# Altium PCB StepStick-2.PcbDoc
Units mil, origin at the board's own origin, x right, y up, seen from the top; angles counter-clockwise.
Board outline 1150 x 1155 mil, 2 copper layers (Top Layer, Bottom Layer); 4 components, 11 nets, 32 pads, 0 vias.
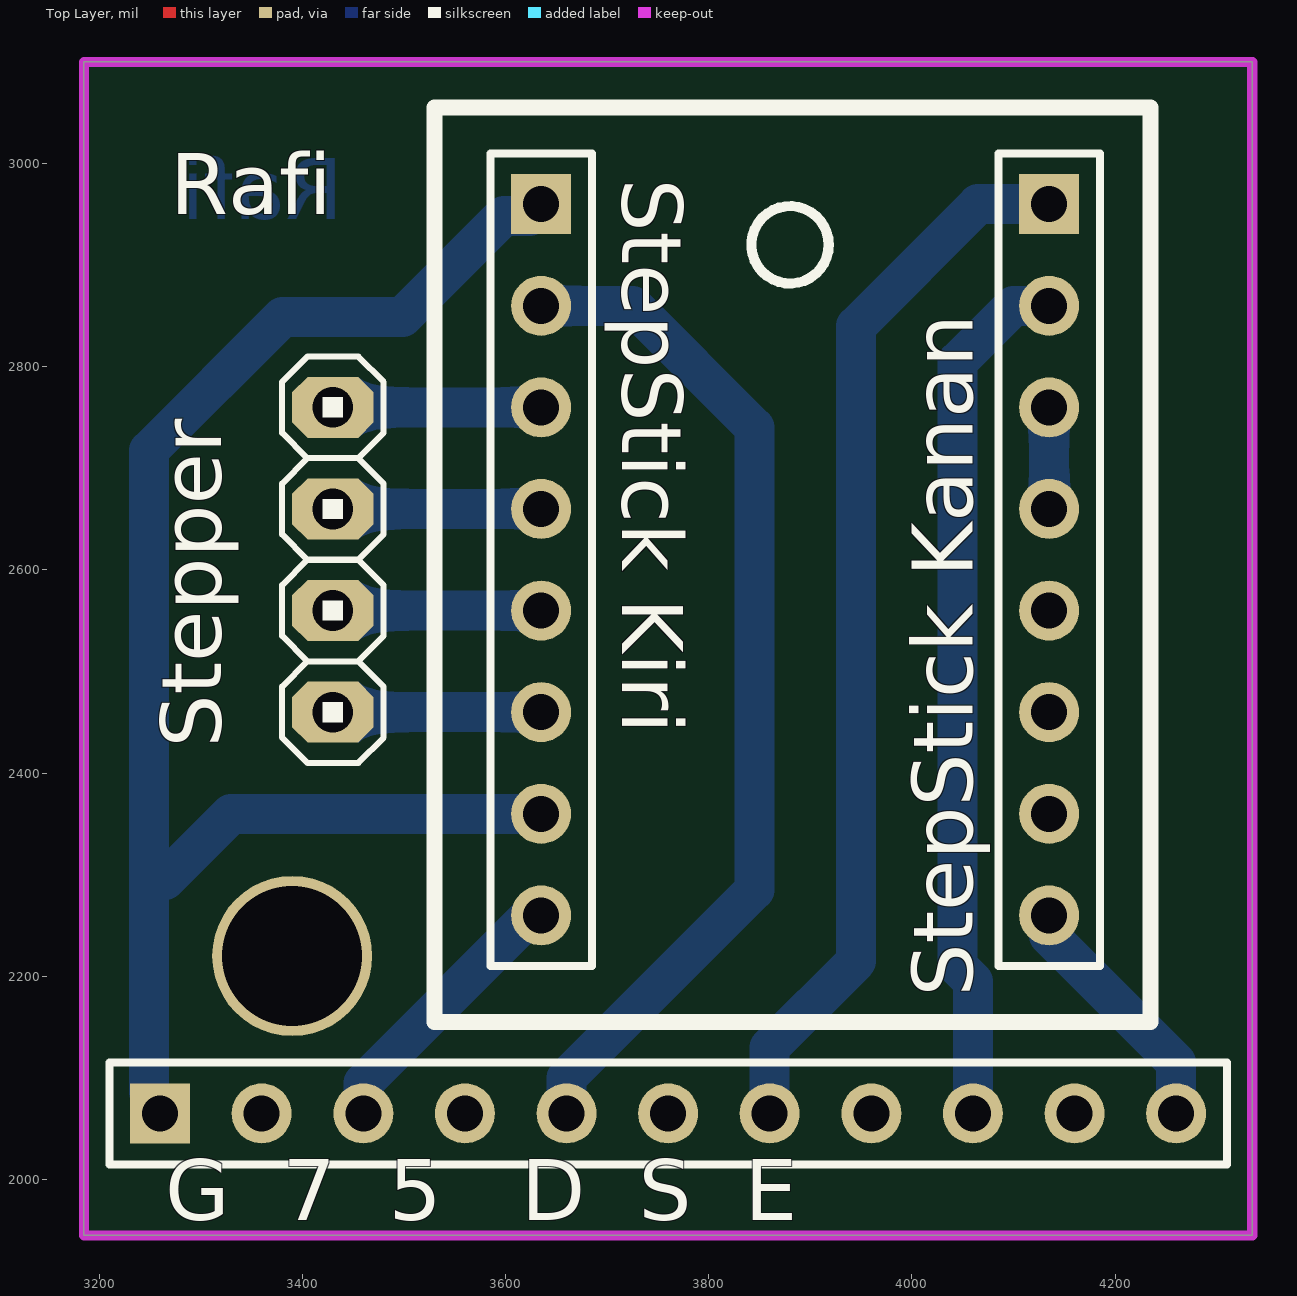
[diagram p0: Top Layer view]
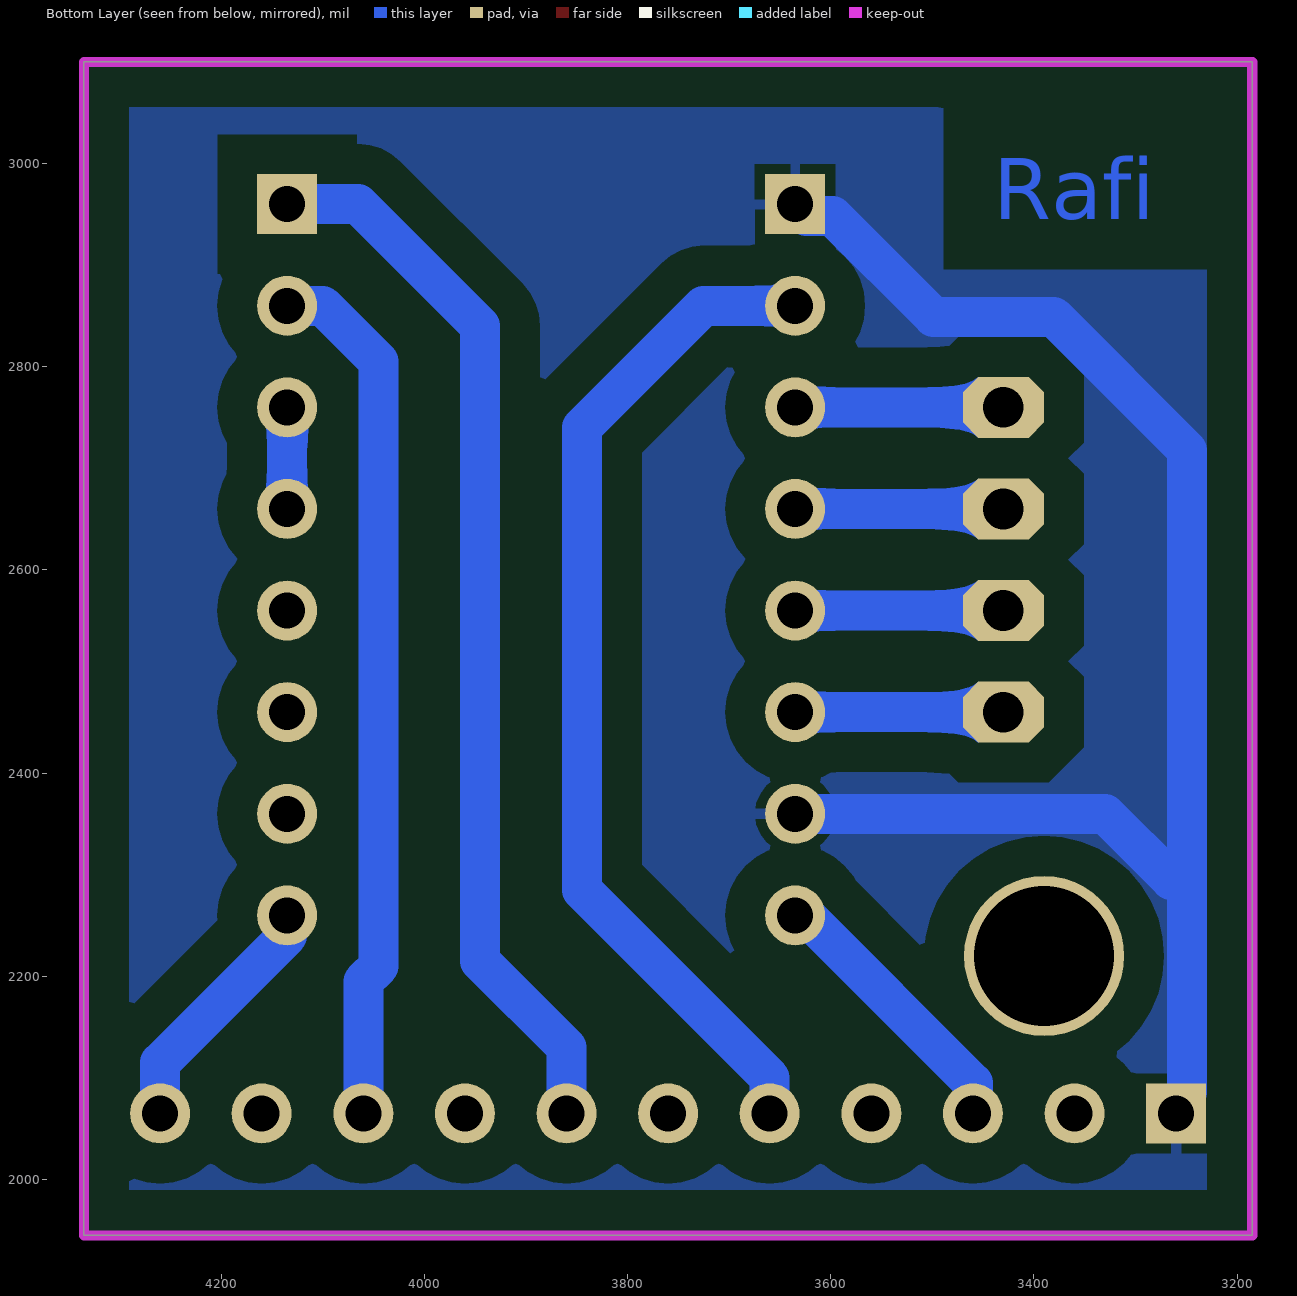
[diagram p1: Bottom Layer view, seen from below]

## Layer stack, top to bottom
Top Solder: solder mask 0.4, Solder Resist, Dk 3.5
Top Layer: signal copper 1.4
Dielectric 1: dielectric 12.6, FR-4, Dk 4.8
Bottom Layer: signal copper 1.4
Bottom Solder: solder mask 0.4, Solder Resist, Dk 3.5

## Board outline
3185,1945 4335,1945 4335,3100 3185,3100

## Design rules (kind name [scope] priority, off if disabled: settings)
Clearance [All] p1: gap=39.37
PolygonConnect [All] p1: connectstyle=Relief reliefconductorwidth=10 reliefentries=4 polygonreliefangle="90 Angle" airgapwidth=10
RoutingVias [All] p1: holewidth=28 width=50 viastyle="Through Hole" minholewidth=28 minwidth=50 maxholewidth=28 maxwidth=50
SolderMaskExpansion [All] p1: expansion=4
Width [All] p1: maxlimit=39.37 minlimit=39.37 preferedwidth=39.37
30 further rules are at their usual default settings.

## Components (designator, comment, footprint, x,y, rotation, side; value= is the part's Value field where it differs from the comment)
"G  7  5   D  S  E" "Header 11" HDR1X11 3260,2065 r0 top (schematic designator P?)
Stepper "" My_1X04 3430,2610 r270 top
"StepStick Kanan" "" HDR1X8 4135,2960 r270 top
"StepStick Kiri" "" HDR1X8 3635,2960 r270 top

## Footprints (in the part's own frame and the unit in brackets; to place one, negate y for a bottom-side part, rotate by r counter-clockwise, add the part's x,y. Pads: shape width x height; smd on the part's side, far side on the other; paste and mask are expansions set on the pad)
HDR1X8 [mm] "Connector; Header; 8 Position"
  rect 1.5x1.5 hole 0.9: 1(0,0)
  round 1.5 hole 0.9: 2(2.54,0) 3(5.08,0) 4(7.62,0) 5(10.16,0) 6(12.7,0) 7(15.24,0) 8(17.78,0)
  silkscreen extent -1.27,-1.27 19.05,1.27
HDR1X11 [mm] "Connector; Header; 11 Position"
  rect 1.5x1.5 hole 0.9: 1(0,0)
  round 1.5 hole 0.9: 2(2.54,0) 3(5.08,0) 4(7.62,0) 5(10.16,0) 6(12.7,0) 7(15.24,0) 8(17.78,0) 9(20.32,0) 10(22.86,0) 11(25.4,0)
  silkscreen extent -1.27,-1.27 26.67,1.27
My_1X04 [mil]
  oct 60x80 hole 40: 1(-150,0) 2(-50,0) 3(50,0) 4(150,0)
  silkscreen extent -200,-50 200,50

## Part data
"G  7  5   D  S  E": "Header, 11-Pin"
Stepper: library part "Header 4", "Header, 4-Pin"
"StepStick Kanan" "StepStick Kiri": library part "Header 8", "Header, 8-Pin"

## Free pads (board coordinates)
  round 157.48 hole 137.8: 10(3390,2220)

## Nets (pads, with @x,y where several pads share a name; then routed paths per layer and width w, separated by ;. In a path a pad name is that pad's centre, name@x,y a point inside that pad or via, vN(x,y) a via of type N, cw(c..) or ccw(c..) an arc to the next point about the centre after c; other vN are vias at no path point)
+5: "G  7  5   D  S  E.5" "StepStick Kiri.2" | length 1011.3
  Bottom Layer w39.37: 3635,2860 3725,2860 3845,2740 3845,2285 3660,2100 3660,2065
+7.4: "G  7  5   D  S  E.3" "StepStick Kiri.8" | length 273.3
  Bottom Layer w39.37: 3460,2065 3460,2095 3625,2260 3635,2260
GND: "G  7  5   D  S  E.1" "StepStick Kiri.1" "StepStick Kiri.7" | length 1537.5
  Bottom Layer w39.37: 3265,2070 3249.06,2085.94 3249.06,2717.57 3380.54,2849.06 3498.78,2849.06 3598.31,2948.58 3623.58,2948.58 3635,2960 ; 3265,2295 3330,2360 3635,2360
NetP?_7: "G  7  5   D  S  E.7" "StepStick Kanan.1" | length 1049.9
  Bottom Layer w39.37: 3860,2065 3860,2130 3945,2215 3945,2840 4065,2960 4135,2960
NetP?_9: "G  7  5   D  S  E.9" "StepStick Kanan.2" | length 859
  Bottom Layer w39.37: 4060,2065 4060,2195 4045,2210 4045,2805 4100,2860 4135,2860
NetP?_11: "G  7  5   D  S  E.11" "StepStick Kanan.8" | length 246.8
  Bottom Layer w39.37: 4135,2260 4135,2240 4260,2115 4260,2065
NetStepper_1: "StepStick Kiri.3" Stepper.1 | length 205
  Bottom Layer w39.37: Stepper.1 3635,2760
NetStepper_2: "StepStick Kiri.4" Stepper.2 | length 205
  Bottom Layer w39.37: Stepper.2 3635,2660
NetStepper_3: "StepStick Kiri.5" Stepper.3 | length 205
  Bottom Layer w39.37: Stepper.3 3635,2560
NetStepper_4: "StepStick Kiri.6" Stepper.4 | length 205
  Bottom Layer w39.37: Stepper.4 3635,2460
"NetStepStick Kanan_3": "StepStick Kanan.3" "StepStick Kanan.4" | length 100
  Bottom Layer w39.37: 4135,2660 4135,2760
pads on no net: "G  7  5   D  S  E.2" "G  7  5   D  S  E.4" "G  7  5   D  S  E.6" "G  7  5   D  S  E.8" "G  7  5   D  S  E.10" "StepStick Kanan.5" "StepStick Kanan.6" "StepStick Kanan.7"

## Polygon pours and split planes (outlines as drawn)
GND on Bottom Layer "Bottom Layer-GND" (solid, pour order 3): 3185,1945 3185,3100 4335,3100 4335,1945 3185,1945

## Keep-outs
Keep-Out Layer:
  the board outline again, w10

## Other copper
Bottom Layer:
  text "Rafi" at 3440,2945 h60

## Silkscreen, mask and mechanical layers (free items; w line width, h text height)
Top Overlay:
  circle w10: c3880,2920 r38.08
  lines w15.75: 3530,2155 4235,2155 4235,3055 3530,3055 3530,2155
  text "Rafi" at 3270,2950 h60